# EAGLE board ice header adapter pcb (EAGLE 7.3.0)
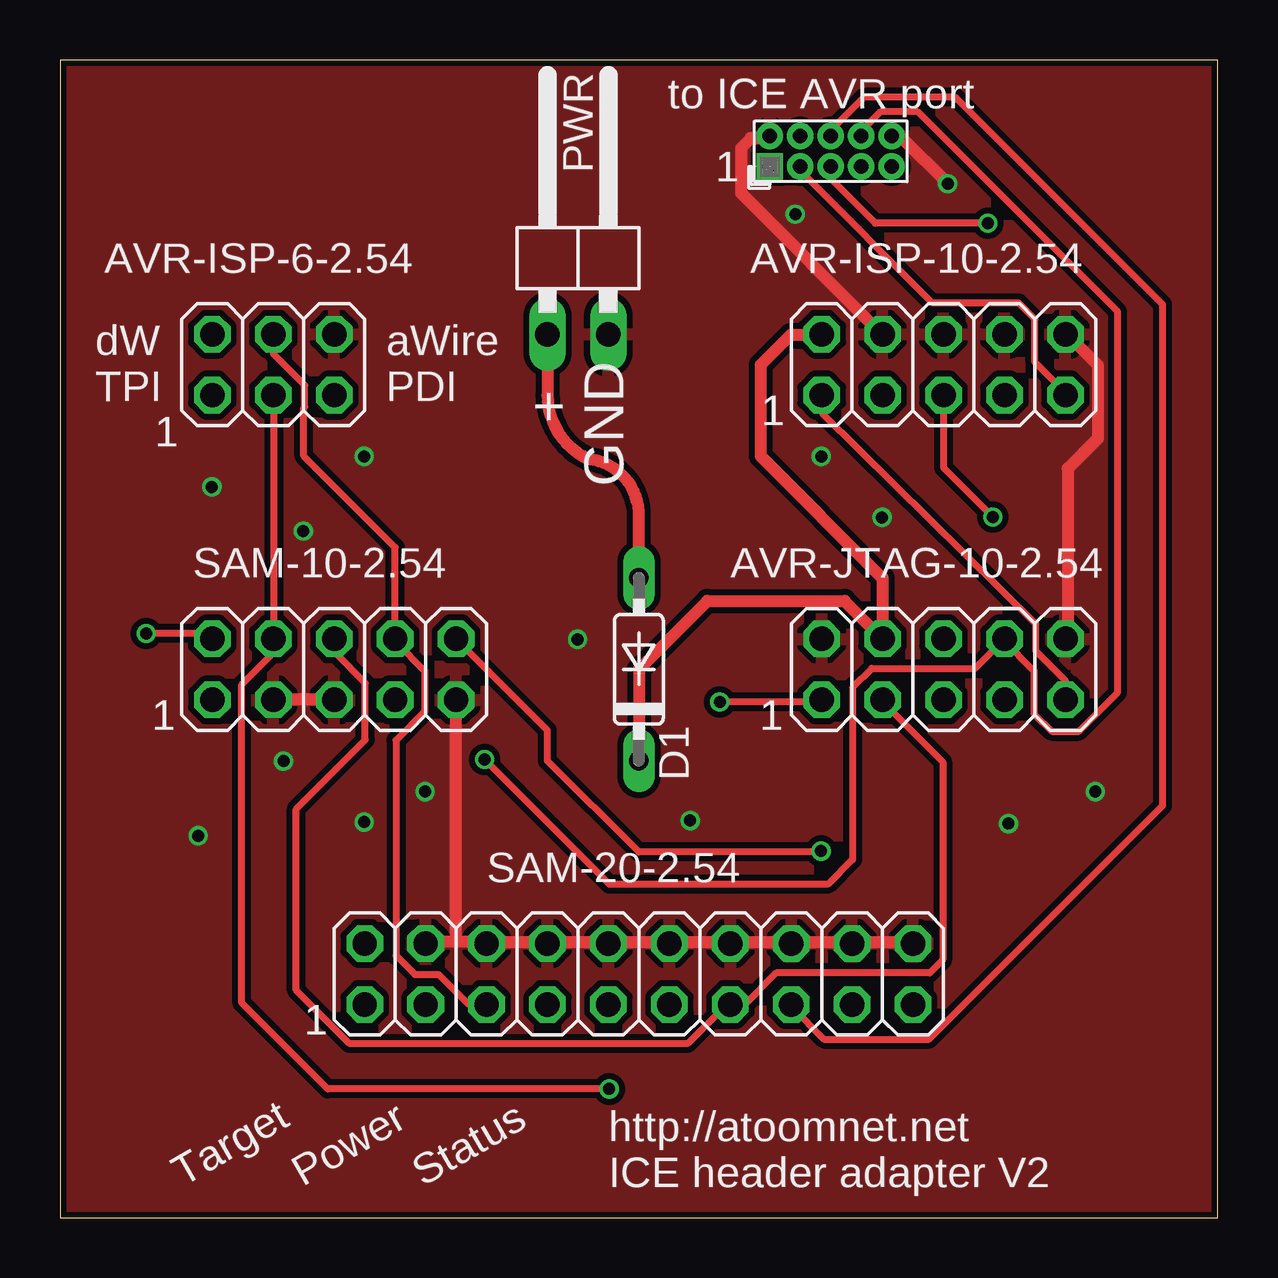
[diagram p0: board, top side]
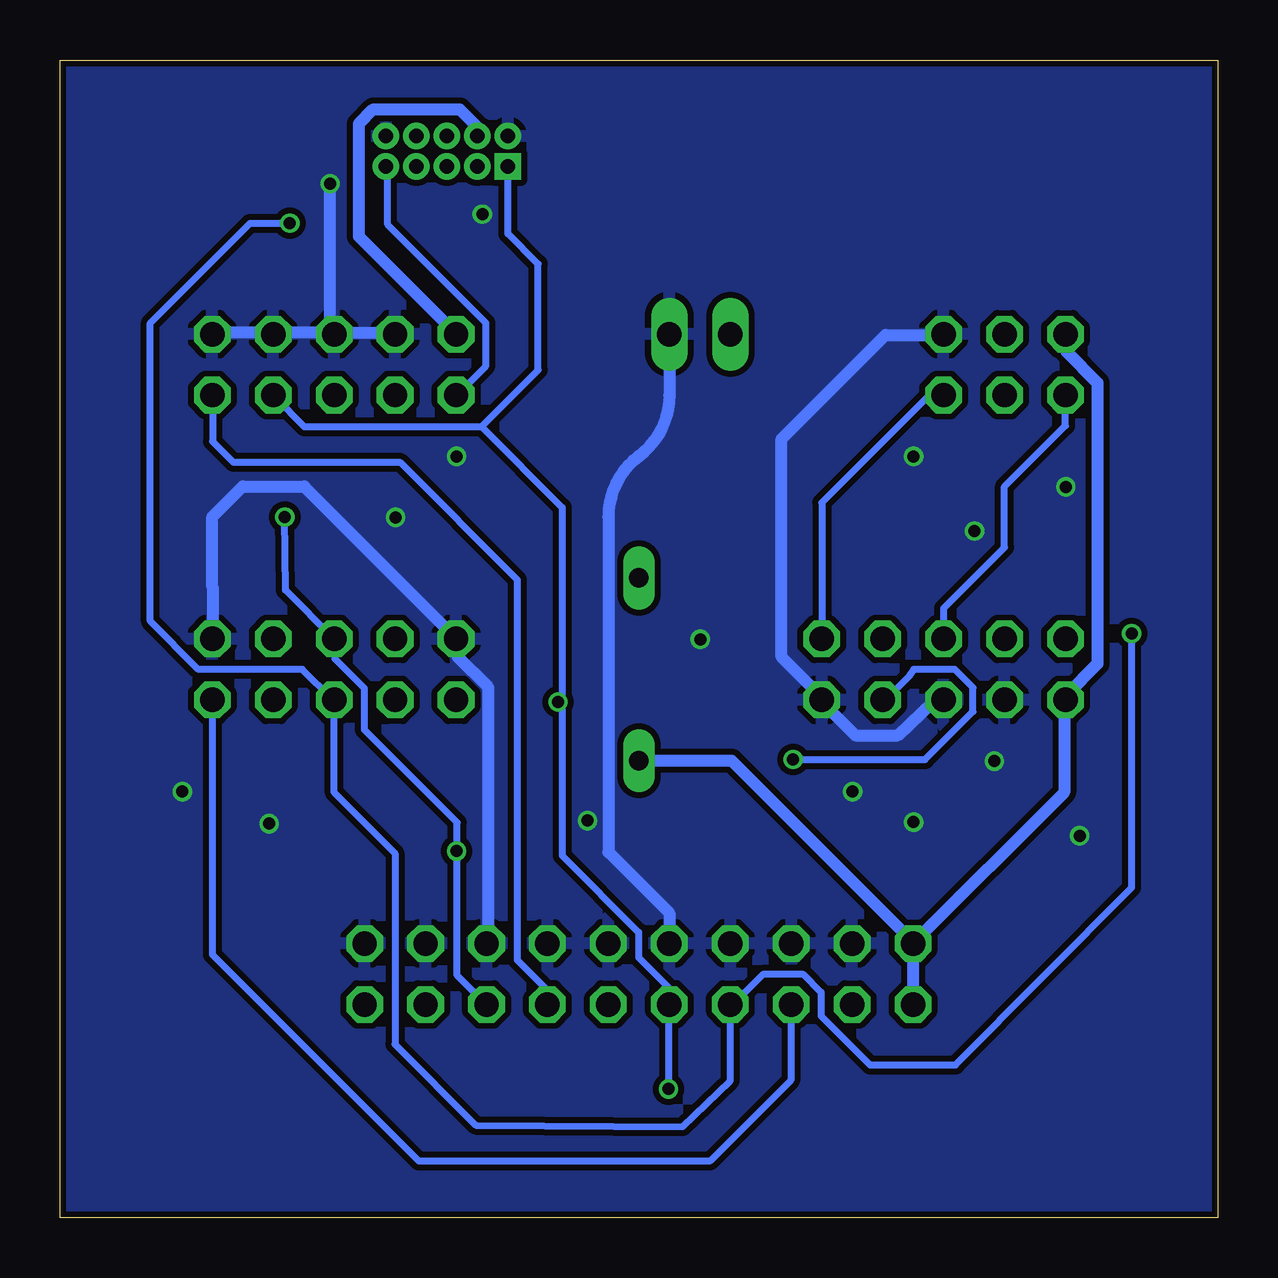
[diagram p1: board, bottom side, seen from below]

Size 48.26 x 48.26 mm. Coordinates in mm from the lower left corner, seen from the top.
Outline: 0,0 48.26,0 48.26,48.26 0,48.26 0,0
Copper layers (1*16): Top 0.035mm / dielectric 1.5mm / Bottom 0.035mm
Design rules "ITEADstudio_DRC-via-distance": minimum track width 6mil, minimum drill 12mil, track to track 6mil, track to pad 6mil, pad to pad 6mil, via to via 0.8mm, smd to smd 0mil, copper to edge 10mil, drill to drill 10mil, minimum pad ring 10mil, minimum via ring 6mil, stop-mask expansion 2mil, vias tented up to drill 100mil, thermal gap 10mil
Net classes: 0 default: width 0.3 mm, drill 0.3 mm, clearance 0.25 mm; 1 pwr: width 0.5 mm, drill 0.5 mm, clearance 0.25 mm
vRestrict: area 3.8,46.2 to 15.2,47; area 27.2,43.2 to 27.9,44.5; area 26.7,29.2 to 27.5,30.5; area 39.4,44.5 to 47,45.7; area 27.9,40.6 to 45.7,41.9; area 27.8,27.9 to 45.7,29.2; area 7.6,15.2 to 19.7,16.4; area 25,17.7 to 26.7,20.4; area 25.1,15.9 to 26,17.1; area 6.3,7.6 to 7.2,8.8; area 1.3,16.4 to 2.3,17.8; area 5.4,27.9 to 17.7,29.2; 9 more areas

## Footprints (pad centres in the part's own frame; a part is rotated, then mirrored left to right if it is on the bottom)
2X03 = drill 1.016 octagon: 1 -2.54,-1.27; 2 -2.54,1.27; 3 0,-1.27; 4 0,1.27; 5 2.54,-1.27; 6 2.54,1.27
2X05 = drill 1.016 octagon: 1 -5.08,-1.27; 2 -5.08,1.27; 3 -2.54,-1.27; 4 -2.54,1.27; 5 0,-1.27; 6 0,1.27; 7 2.54,-1.27; 8 2.54,1.27; 9 5.08,-1.27; 10 5.08,1.27
DO35-7 = drill 0.813 long: A 3.81,0; C -3.81,0
PINHEAD_2X05_127 = drill 0.6 pad 1.016 square: 1 -0.635,2.54 | drill 0.6 pad 1.016: 2 0.635,2.54; 3 -0.635,1.27; 4 0.635,1.27; 5 -0.635,0; 6 0.635,0; 7 -0.635,-1.27; 8 0.635,-1.27; 9 -0.635,-2.54; 10 0.635,-2.54
1X02/90 = drill 1.016 long: 1 -1.27,-3.81; 2 1.27,-3.81
2X10 = drill 1.016 octagon: 1 -11.43,-1.27; 2 -11.43,1.27; 3 -8.89,-1.27; 4 -8.89,1.27; 5 -6.35,-1.27; 6 -6.35,1.27; 7 -3.81,-1.27; 8 -3.81,1.27; 9 -1.27,-1.27; 10 -1.27,1.27; 11 1.27,-1.27; 12 1.27,1.27; 13 3.81,-1.27; 14 3.81,1.27; 15 6.35,-1.27; 16 6.35,1.27; 17 8.89,-1.27; 18 8.89,1.27; 19 11.43,-1.27; 20 11.43,1.27

## Placement (x,y rotation side)
AVR-ISP-6-2.54  [2X03]  8.89,35.56 0 top
AVR-ISP-10-2.54  [2X05]  36.83,35.56 0 top
AVR-JTAG-10-2.54  [2X05]  36.83,22.86 0 top
D1  1N4148  [DO35-7]  24.13,22.86 90 top
ICE-AVR  [PINHEAD_2X05_127]  32.13,44.45 90 top
PWR  [1X02/90]  21.59,40.64 0 top
SAM-10-2.54  [2X05]  11.43,22.86 0 top
SAM-20-2.54  [2X10]  24.13,10.16 0 top

## Library data of the parts
AVR-ISP-6-2.54 AVR-ISP-10-2.54 AVR-JTAG-10-2.54 PWR SAM-10-2.54 SAM-20-2.54 = pinhead
D1 = diode
ICE-AVR = Arduino_Wifi_shield_v018_tG

## Nets
GND [pwr]: AVR-ISP-6-2.54.6 AVR-ISP-10-2.54.4 AVR-ISP-10-2.54.6 AVR-ISP-10-2.54.8 AVR-ISP-10-2.54.10 AVR-JTAG-10-2.54.2 AVR-JTAG-10-2.54.10 ICE-AVR.2 ICE-AVR.10 PWR.2 SAM-10-2.54.3 SAM-10-2.54.5 SAM-10-2.54.9 SAM-20-2.54.4 SAM-20-2.54.6 SAM-20-2.54.8 SAM-20-2.54.10 SAM-20-2.54.12 SAM-20-2.54.14 SAM-20-2.54.16 SAM-20-2.54.18 SAM-20-2.54.20
N$2: D1.A PWR.1
NSRST: AVR-ISP-6-2.54.5 AVR-ISP-10-2.54.5 AVR-JTAG-10-2.54.6 ICE-AVR.6 SAM-10-2.54.10 SAM-20-2.54.15
NTRST: AVR-JTAG-10-2.54.8 ICE-AVR.8 SAM-10-2.54.7
TCK: AVR-ISP-6-2.54.3 AVR-ISP-10-2.54.7 AVR-JTAG-10-2.54.1 ICE-AVR.1 SAM-10-2.54.4 SAM-20-2.54.9
TDI: AVR-ISP-6-2.54.4 AVR-ISP-10-2.54.1 AVR-JTAG-10-2.54.9 ICE-AVR.9 SAM-10-2.54.8 SAM-20-2.54.5
TDO: AVR-ISP-6-2.54.1 AVR-ISP-10-2.54.9 AVR-JTAG-10-2.54.3 ICE-AVR.3 SAM-10-2.54.6 SAM-20-2.54.13
TMS: AVR-JTAG-10-2.54.5 ICE-AVR.5 SAM-10-2.54.2 SAM-20-2.54.7
VTG [pwr]: AVR-ISP-6-2.54.2 AVR-ISP-10-2.54.2 AVR-JTAG-10-2.54.4 D1.C ICE-AVR.4 SAM-10-2.54.1 SAM-20-2.54.1 SAM-20-2.54.2

## Tracks (layer width: path | path; a pad name or v marks a point on that pad's centre or on a via)
GND  (via drill 0.5)
  Top 0.5: AVR-JTAG-10-2.54.10 42,24.2 42,31.23 43.26,32.49 43.26,35.54 42,36.8 AVR-ISP-10-2.54.10 | ICE-AVR.2 29.5,45 28.8,45 28.4,44.6 28.4,42.7 34.2,36.9 AVR-ISP-10-2.54.4 | v37,43.1 35.1,45 34.7,45 ICE-AVR.10 | SAM-10-2.54.3 11.4,21.6 SAM-10-2.54.5 | 16.5,11.5 17.7,11.5 SAM-20-2.54.6 18,11.5 20.3,11.5 SAM-20-2.54.8 20.5,11.5 22.8,11.5 SAM-20-2.54.10 23.1,11.5 25.4,11.5 SAM-20-2.54.12 25.6,11.5 27.9,11.5 SAM-20-2.54.14 28.1,11.5 30.4,11.5 SAM-20-2.54.16 30.7,11.5 33,11.5 SAM-20-2.54.18 33.2,11.5 35.5,11.5 SAM-20-2.54.20 | 16.5,11.5 15.3,11.5 SAM-20-2.54.4 | 16.5,11.5 16.5,21.5 SAM-10-2.54.9
  Bottom 0.5: v37,43.1 37,37 AVR-ISP-10-2.54.6 | AVR-ISP-10-2.54.6 37.2,36.9 39.3,36.9 AVR-ISP-10-2.54.8 39.6,36.9 41.9,36.9 AVR-ISP-10-2.54.10 | AVR-ISP-10-2.54.4 34.3,36.9 36.6,36.9 AVR-ISP-10-2.54.6 | SAM-20-2.54.16 30.4,11.5 30.4,22.1 31.7,23.4 31.7,24.1 AVR-JTAG-10-2.54.2 31.9,24.3 38.08,30.48 40.64,30.48 41.91,29.21 41.91,26.31 41.9,26.3 41.9,24.2 AVR-JTAG-10-2.54.10 | SAM-10-2.54.5 11.5,21.5 11.88,21.5 13.34,20.11 15.11,20.11 16.5,21.5 SAM-10-2.54.9 16.6,21.8 18.18,23.38 18.18,32.47 13.85,36.8 11.5,36.8 AVR-ISP-6-2.54.6 | SAM-20-2.54.10 22.86,12.7 25.4,15.24 25.4,29.21 arc53 24.13,31.75 arc-53 22.86,34.29 PWR.2
  other vias: 39.54,16.43 43.16,17.76 26.27,16.56 21.57,24.11 5.76,15.92 9.31,19.03 6.33,30.46 12.68,31.73 15.22,17.76 10.14,28.62 34.27,29.19 31.73,31.73 12.68,16.49 30.65,41.83
  pour Bottom: -1.27,49.53 -1.27,0 49.53,0 49.53,49.53
  pour Top: -2.54,50.8 -2.54,-1.27 50.8,-1.27 50.8,50.8
N$2
  Top 0.5: PWR.1 20.32,34.29 arc65 22.04,31.62 arc-86 24.13,29.21 D1.A
NSRST  (via drill 0.5)
  Top 0.3: ICE-AVR.6 32.2,45.1 32.2,45.4 33.5,46.7 37.32,46.7 45.96,38.06 45.96,17.18 36.23,7.45 31.85,7.45 30.5,8.8 SAM-20-2.54.15 | AVR-ISP-10-2.54.5 36.83,31.27 v38.89,29.21 | v31.73,15.28 31.69,15.24 24.13,15.24 20.32,19.05 20.32,20.32 SAM-10-2.54.10
  Bottom 0.3: SAM-10-2.54.10 16.5,24.2 16.5,29.81 12.02,34.29 AVR-ISP-6-2.54.5 | 31.7,14.9 31.7,10.1 30.5,8.9 SAM-20-2.54.15 | 31.7,14.9 31.7,16.47 35.56,20.34 35.56,22.06 36.8,23.3 36.8,24.1 AVR-JTAG-10-2.54.6 38.86,26.16 v38.89,29.21 | v31.73,15.28 31.7,14.9
NTRST  (via drill 0.5)
  Top 0.3: ICE-AVR.8 33.4,45.3 34.2,46.1 35.75,46.1 44.09,37.76 44.09,21.9 42.46,20.27 41.34,20.27 40.6,21.01 40.6,22.8 39.3,24.1 AVR-JTAG-10-2.54.8 38.14,22.9 33.84,22.9 33.04,22.1 33.04,14.94 32,13.9 22.9,13.9 v17.7,19.1
  Bottom 0.3: SAM-10-2.54.7 13.58,21.85 12.86,22.57 12.67,22.86 10.96,22.86 10.2,22.1 10.2,21.1 12.2,19.1 v17.7,19.1
TCK  (via drill 0.5)
  Top 0.3: AVR-ISP-6-2.54.3 8.9,34.2 8.9,24.2 SAM-10-2.54.4 8.9,24 8.9,23.55 7.57,22.23 7.57,8.95 11.16,5.37 v22.89,5.37 | v27.5,21.5 31.69,21.5 31.7,21.5 31.7,21.54 AVR-JTAG-10-2.54.1
  Bottom 0.3: 30.69,32.97 28.33,35.34 28.33,39.76 29.59,41.02 ICE-AVR.1 29.6,43.8 | 30.69,32.97 38.07,32.97 39.3,34.2 AVR-ISP-10-2.54.7 | 27.33,21.59 27.33,29.61 30.69,32.97 | 27.33,21.59 27.33,15.09 24.14,11.9 24.14,10.85 22.9,9.61 22.9,8.9 SAM-20-2.54.9 22.9,8.8 v22.89,5.37 | v27.5,21.5 27.24,21.5 arc90 27.33,21.59
TDI
  Top 0.3: AVR-JTAG-10-2.54.9 41.9,22.4 40.66,23.64 40.66,24.76 31.8,33.5 31.8,34.2 AVR-ISP-10-2.54.1 | SAM-20-2.54.5 17.7,8.9 17.03,8.9 15.79,10.14 14.8,10.14 14,10.94 14,19.9 15.2,21.1 15.2,22.8 14,24 SAM-10-2.54.8 13.9,24.2 13.97,24.27 13.97,27.94 10.16,31.75 10.16,33.76 10.2,33.8 10.2,34.7 8.9,36 8.9,36.8 AVR-ISP-6-2.54.4
  Bottom 0.3: ICE-AVR.9 34.6,43.8 34.6,41.4 30.5,37.3 30.5,35.5 31.7,34.3 AVR-ISP-10-2.54.1 | AVR-JTAG-10-2.54.9 41.9,21.5 41.9,10.96 33.3,2.36 21.17,2.36 17.8,5.73 17.8,8.8 SAM-20-2.54.5
TDO
  Top 0.3: AVR-JTAG-10-2.54.3 34.3,21.5 36.8,19 36.8,10.75 36.25,10.2 29.85,10.2 28.55,8.9 28,8.9 SAM-20-2.54.13 27.8,8.9 26.16,7.25 12.07,7.25 9.85,9.48 9.85,17.04 12.73,19.92 12.73,22.29 11.5,23.52 11.5,24.1 SAM-10-2.54.6 | ICE-AVR.3 30.9,43.8 30.9,43.6 36.37,38.13 39.96,38.13 40.64,37.45 40.64,35.66 42,34.3 AVR-ISP-10-2.54.9
  Bottom 0.3: SAM-20-2.54.13 28,8.9 28,9.55 29.2,10.75 29.2,26.6 34.09,31.49 41.03,31.49 41.9,32.36 41.9,34.2 AVR-ISP-10-2.54.9 | SAM-10-2.54.6 11.43,25.4 8.89,27.94 8.89,30.48 6.35,33.02 AVR-ISP-6-2.54.1
TMS  (via drill 0.5)
  Top 0.3: SAM-10-2.54.2 6.3,24.2 6.15,24.35 v3.59,24.35 | v38.68,41.46 33.98,41.46 32.13,43.31 ICE-AVR.5
  Bottom 0.3: AVR-JTAG-10-2.54.5 36.9,21.6 38.16,22.86 42.49,22.86 44.5,24.87 44.5,37.3 40.34,41.46 v38.68,41.46 | 36.8,21.5 AVR-JTAG-10-2.54.5 | v3.59,24.35 3.59,13.77 10.93,6.37 14.49,6.37 16.54,8.41 16.54,9.4 17.3,10.16 18.94,10.16 20.2,8.9 SAM-20-2.54.7 20.32,5.71 22.3,3.79 30.93,3.86 34.3,7.23 34.3,15.19 36.83,17.72 AVR-JTAG-10-2.54.5
VTG
  Top 0.5: AVR-ISP-10-2.54.2 31.73,36.83 31.7,36.8 30.45,36.8 29.21,35.56 29.21,31.75 34.29,26.67 AVR-JTAG-10-2.54.4 32.7,25.72 26.99,25.72 24.13,22.86 D1.C
  Bottom 0.5: ICE-AVR.4 30.9,45.1 30.9,45.5 31.6,46.2 35.2,46.2 35.8,45.6 35.8,40.9 31.8,36.9 AVR-ISP-10-2.54.2 | 24.1,19 D1.C 20.25,19.05 12.7,11.5 SAM-20-2.54.2 | SAM-20-2.54.2 SAM-20-2.54.1 | AVR-ISP-6-2.54.2 6.3,36.6 6.3,36.1 5,34.8 5,23.1 6.3,21.8 SAM-10-2.54.1 6.4,21.5 6.4,17.73 SAM-20-2.54.2

## Text on the board
tNames: to ICE AVR port | 1 | dW / TPI | aWire / PDI | + | 1 | 1 | GND | 1 | 1 | 1 | Target | Power | Status | http://atoomnet.net / ICE header adapter V2